# EAGLE board htsenti (EAGLE 9.6.2)
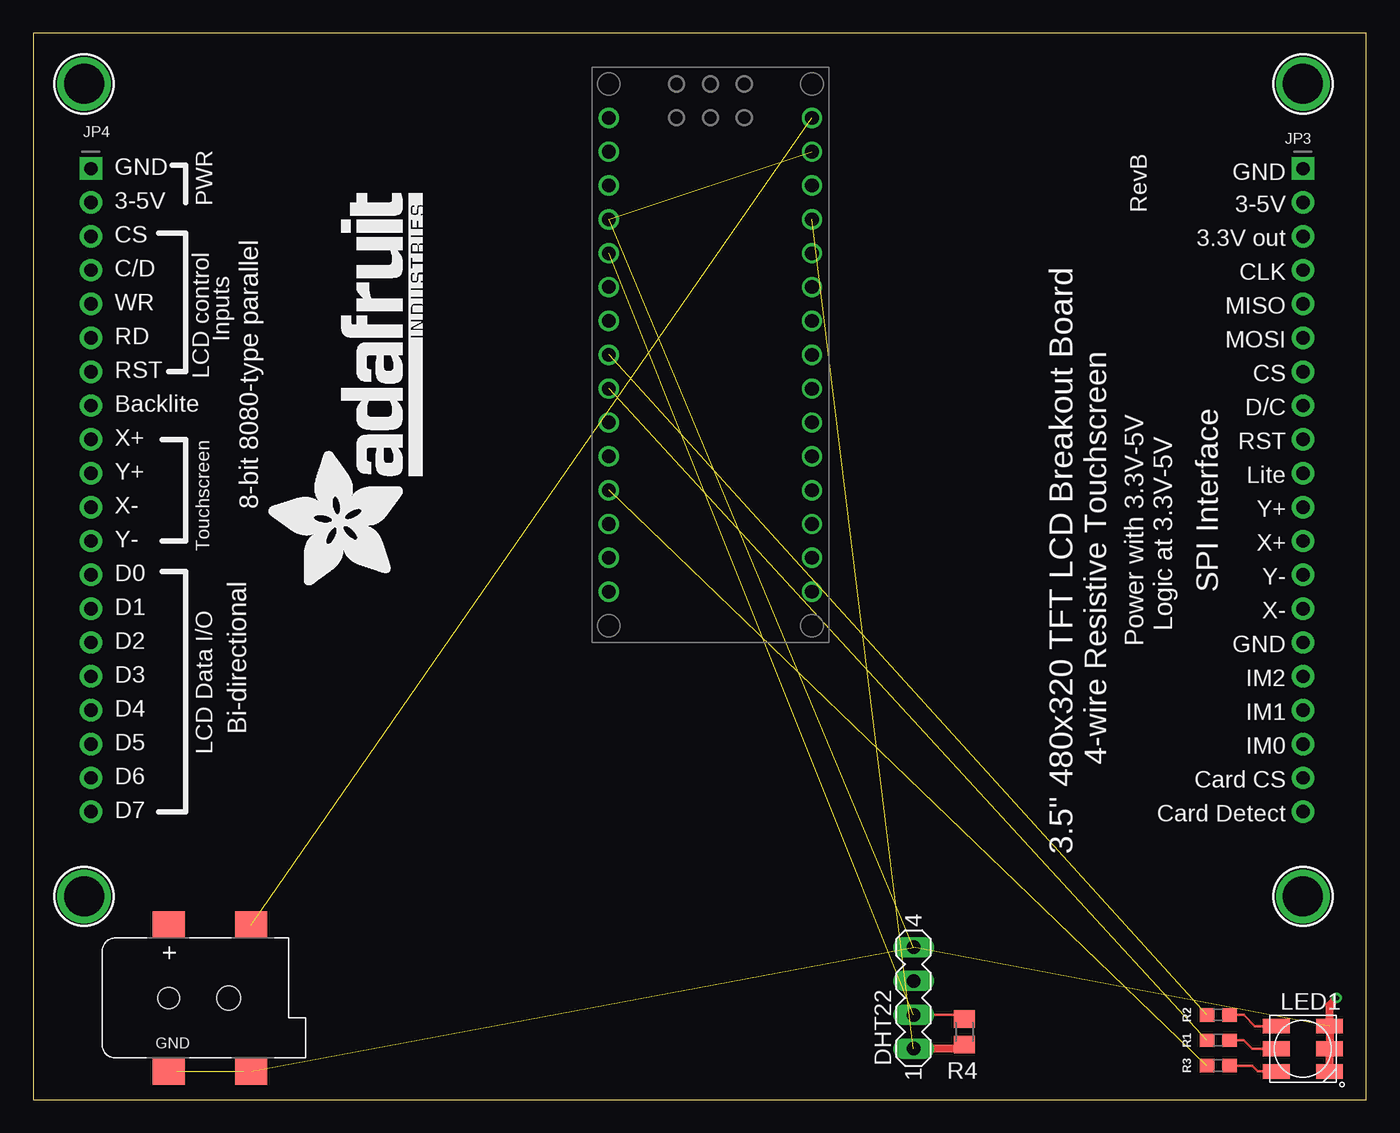
[diagram p0: board, top side]
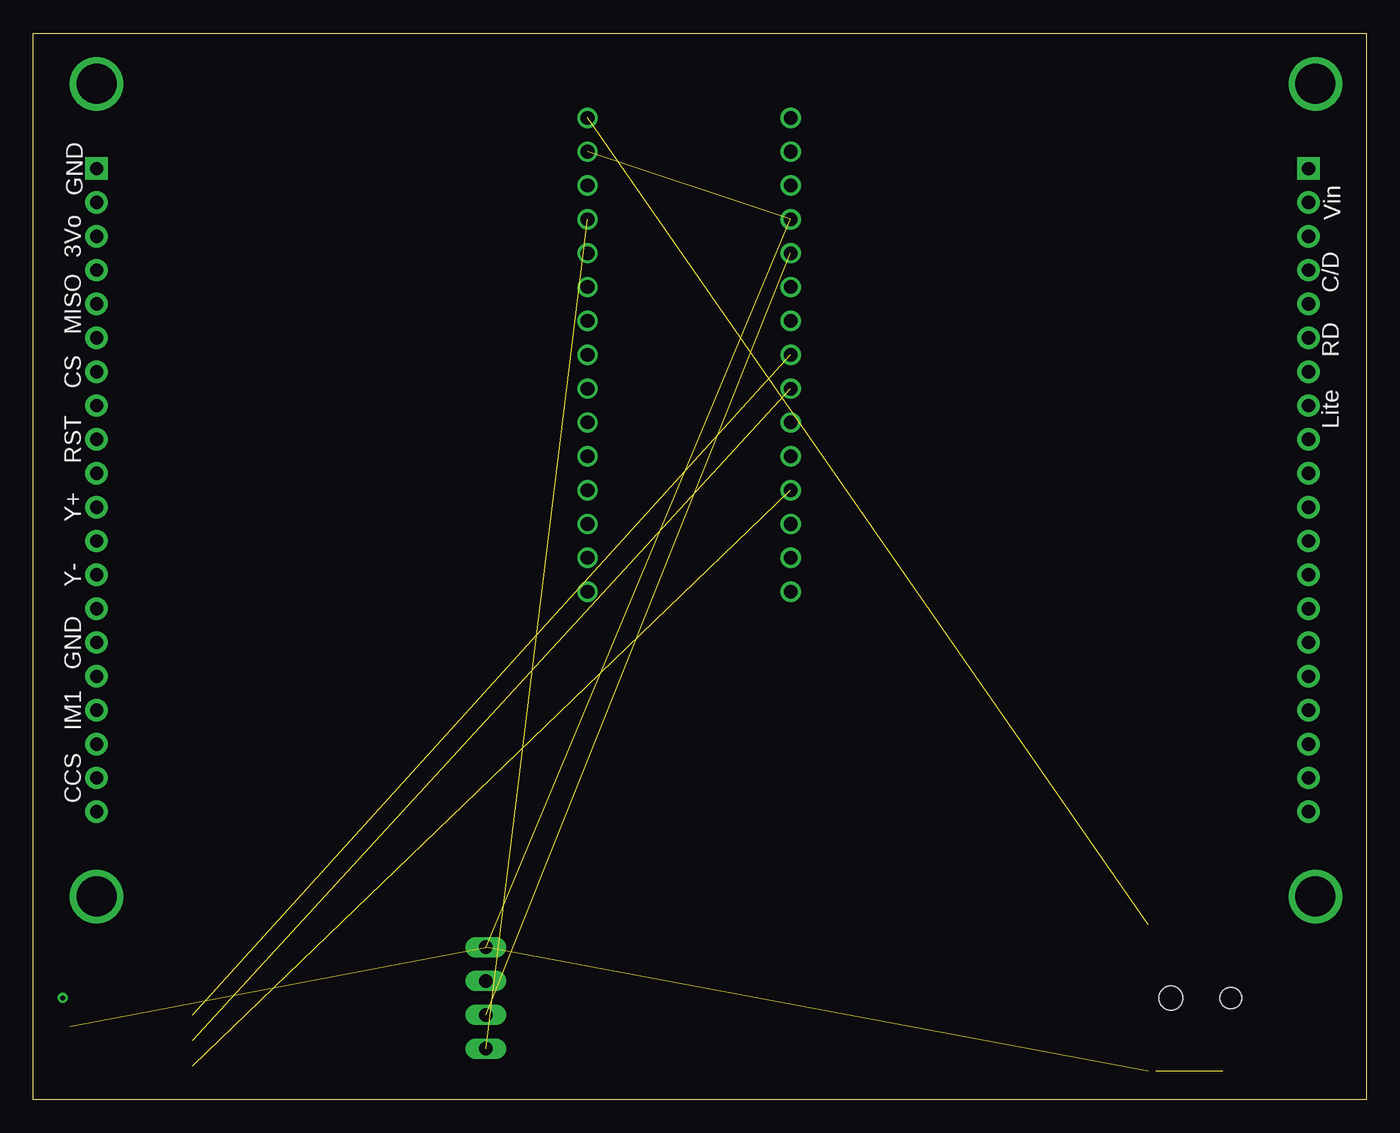
[diagram p1: board, bottom side, seen from below]

Size 100 x 80 mm. Coordinates in mm from the lower left corner, seen from the top.
Outline: 0,0 100,0 100,80 0,80 0,0
Copper layers (1*16): Top 0.035mm / dielectric 1.5mm / Bottom 0.035mm
Design rules "default": minimum track width 6mil, minimum drill 0.35mm, track to track 6mil, track to pad 6mil, pad to pad 6mil, via to via 6mil, smd to smd 6mil, copper to edge 40mil, drill to drill 6mil, minimum pad ring 10mil, minimum via ring 8mil, stop-mask expansion 4mil, vias tented up to drill 0mil, thermal gap 10mil

## Footprints (pad centres in the part's own frame; a part is rotated, then mirrored left to right if it is on the bottom)
MA04-1 = drill 1.016 long: 1 -3.81,0; 2 -1.27,0; 3 1.27,0; 4 3.81,0
NANO = drill 1.016: 1 -7.62,17.78; 2 -7.62,15.24; 3 -7.62,12.7; 4 -7.62,10.16; 5 -7.62,7.62; 6 -7.62,5.08; 7 -7.62,2.54; 8 -7.62,0; 9 -7.62,-2.54; 10 -7.62,-5.08; 11 -7.62,-7.62; 12 -7.62,-10.16; 13 -7.62,-12.7; 14 -7.62,-15.24; 15 -7.62,-17.78; 16 7.62,-17.78; 17 7.62,-15.24; 18 7.62,-12.7; 19 7.62,-10.16; 20 7.62,-7.62; 21 7.62,-5.08; 22 7.62,-2.54; 23 7.62,0; 24 7.62,2.54; 25 7.62,5.08; 26 7.62,7.62; 27 7.62,10.16; 28 7.62,12.7; 29 7.62,15.24; 30 7.62,17.78
1X20_ROUND = drill 1 pad 1.676 square: 1 -24.13,0 | drill 1 pad 1.676: 2 -21.59,0; 3 -19.05,0; 4 -16.51,0; 5 -13.97,0; 6 -11.43,0; 7 -8.89,0; 8 -6.35,0; 9 -3.81,0; 10 -1.27,0; 11 1.27,0; 12 3.81,0; 13 6.35,0; 14 8.89,0; 15 11.43,0; 16 13.97,0; 17 16.51,0; 18 19.05,0; 19 21.59,0; 20 24.13,0
RGBLED5050 = smd 2 x 1.1: 1 -2,1.7; 2 -2,0; 3 -2,-1.7; 4 2,-1.7; 5 2,0; 6 2,1.7
0603 = smd 1.1 x 1: 1 -0.85,0; 2 0.85,0
M0805 = smd 1.3 x 1.6: 1 -0.95,0; 2 0.95,0
DCJACK_2MM_SMT = smd 2.4 x 2: GND 0,-5.5; GNDBREAK 6.2,-5.5; PWR1 0,5.5; PWR2 6.2,5.5 | hole 1.6: 0,0 | hole 1.8: 4.5,0
MOUNTINGHOLE_3.0_PLATEDTHIN = drill 3 pad 3.6: P$1 0,0

## Placement (x,y rotation side)
DHT22  [MA04-1]  66.04,7.62 90 top
J1  NANO_FOOTPRINT  [NANO]  50.8,55.88 0 top
JP3  [1X20_ROUND]  95.25,45.72 270 top
JP4  [1X20_ROUND]  4.32,45.72 270 top
LED1  RGBLED5050  [RGBLED5050]  95.25,3.81 0 top
R1  220  [0603]  88.9,4.45 0 top
R2  220  [0603]  88.9,6.35 0 top
R3  220  [0603]  88.9,2.54 0 top
R4  [M0805]  69.85,5.08 90 top
U$1  2.1MMJACKSMT  [DCJACK_2MM_SMT]  10.16,7.62 0 top
U$2  MOUNTINGHOLE3.0THIN  [MOUNTINGHOLE_3.0_PLATEDTHIN]  95.25,15.24 90 top
U$3  MOUNTINGHOLE3.0THIN  [MOUNTINGHOLE_3.0_PLATEDTHIN]  95.25,76.2 90 top
U$4  MOUNTINGHOLE3.0THIN  [MOUNTINGHOLE_3.0_PLATEDTHIN]  3.81,15.24 90 top
U$5  MOUNTINGHOLE3.0THIN  [MOUNTINGHOLE_3.0_PLATEDTHIN]  3.81,76.2 90 top
U$6  [ADAFRUIT_TEXT_30MM]  29.21,38.35 90 top

## Library data of the parts
DHT22 = con-lstb; OC_FARNELL: unknown; OC_NEWARK: unknown
J1 = SparkFun-Boards
JP3 JP4 U$6 = microbuilder
LED1 R4 U$1 = adafruit
R1-R3 = SparkFun-Resistors; PROD_ID: RES-07861
U$2-U$5 = microbuilder; BOM: EXCLUDE

## Nets
+3V3: J1.17
+5V: DHT22.1 J1.27 R4.1
GND: DHT22.4 J1.4 J1.29 LED1.4 LED1.5 LED1.6 U$1.GND U$1.GNDBREAK
N$1: LED1.2 R1.2
N$2: LED1.1 R2.2
N$3: LED1.3 R3.2
N$4: J1.9 R1.1
N$5: J1.8 R2.1
N$6: J1.12 R3.1
N$7: DHT22.2 J1.5 R4.2
VCC: J1.30 U$1.PWR2

## Tracks (layer width: path | path; a pad name or v marks a point on that pad's centre or on a via)
+5V  (1 unrouted)
  Top 0.61: R4.1 69.53,3.81 DHT22.1
GND  (via drill 0.35)  (5 unrouted)
  Top 0.61: LED1.4 LED1.5 LED1.6 97.25,7.08 v97.79,7.62 | U$1.GND 10.74,2.12 | 15.78,2.12 U$1.GNDBREAK
N$1
  Top 0.203: LED1.2 91.44,3.81 90.81,4.45 R1.2
N$2
  Top 0.203: LED1.1 91.64,5.51 90.81,6.35 R2.2
N$3
  Top 0.203: LED1.3 91.87,2.11 91.44,2.54 R3.2
N$4  (1 unrouted)
N$5  (1 unrouted)
N$6  (1 unrouted)
N$7  (1 unrouted)
  Top 0.203: DHT22.2 69.53,6.35 R4.2
VCC  (1 unrouted)

## Text on the board
tPlace: GND | GND | 3-5V | 3-5V | PWR | RevB | 3.3V out | CS | CLK | C/D | MISO | WR | MOSI | RD | Inputs | CS | RST | LCD control | D/C | Backlite | RST | X+ | Lite | Y+ | SPI Interface | Y+ | X- | 8-bit 8080-type parallel | X+ | Y- | Touchscreen | Y- | D0 | X- | D1 | Logic at 3.3V-5V | GND | D2 | Power with 3.3V-5V | IM2 | D3 | IM1 | D4 | Bi-directional | IM0 | D5 | LCD Data I/O | 4-wire Resistive Touchscreen | Card CS | D6 | Card Detect | D7 | 3.5" 480x320 TFT LCD Breakout Board
bPlace: GND | Vin | 3Vo | C/D | MISO | RD | CS | Lite | RST | Y+ | Y- | GND | IM1 | CCS